# Altium PCB PCB1.PcbDoc
Units mil, origin at the board's own origin, x right, y up, seen from the top; angles counter-clockwise.
Board outline 1633.86 x 1468.5 mil, 2 copper layers (Top Layer, Bottom Layer); 17 components, 12 nets, 42 pads, 2 vias.
Unrouted connection lines stored in the file: 1.
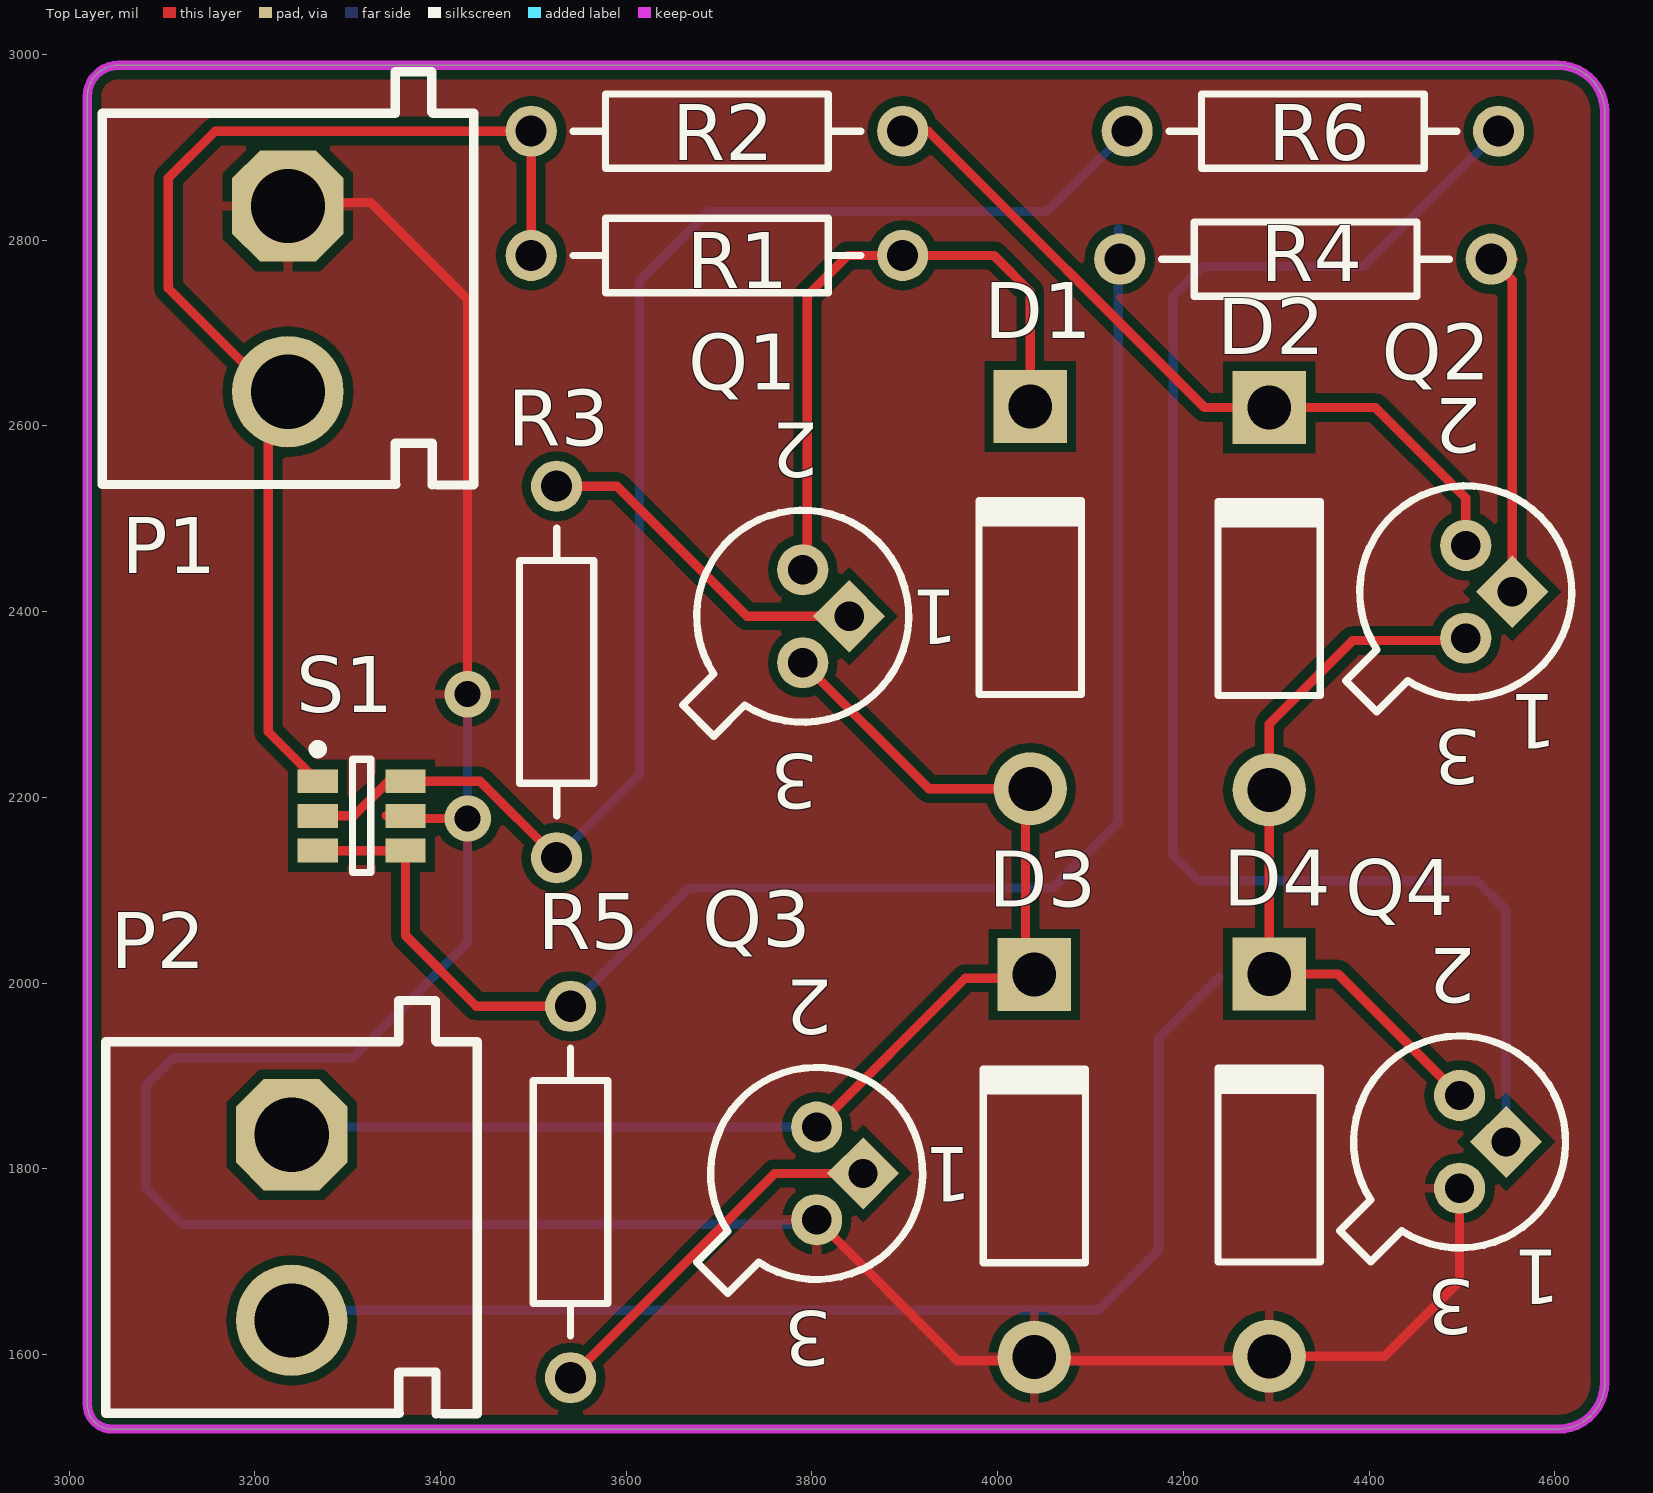
[diagram p0: Top Layer view]
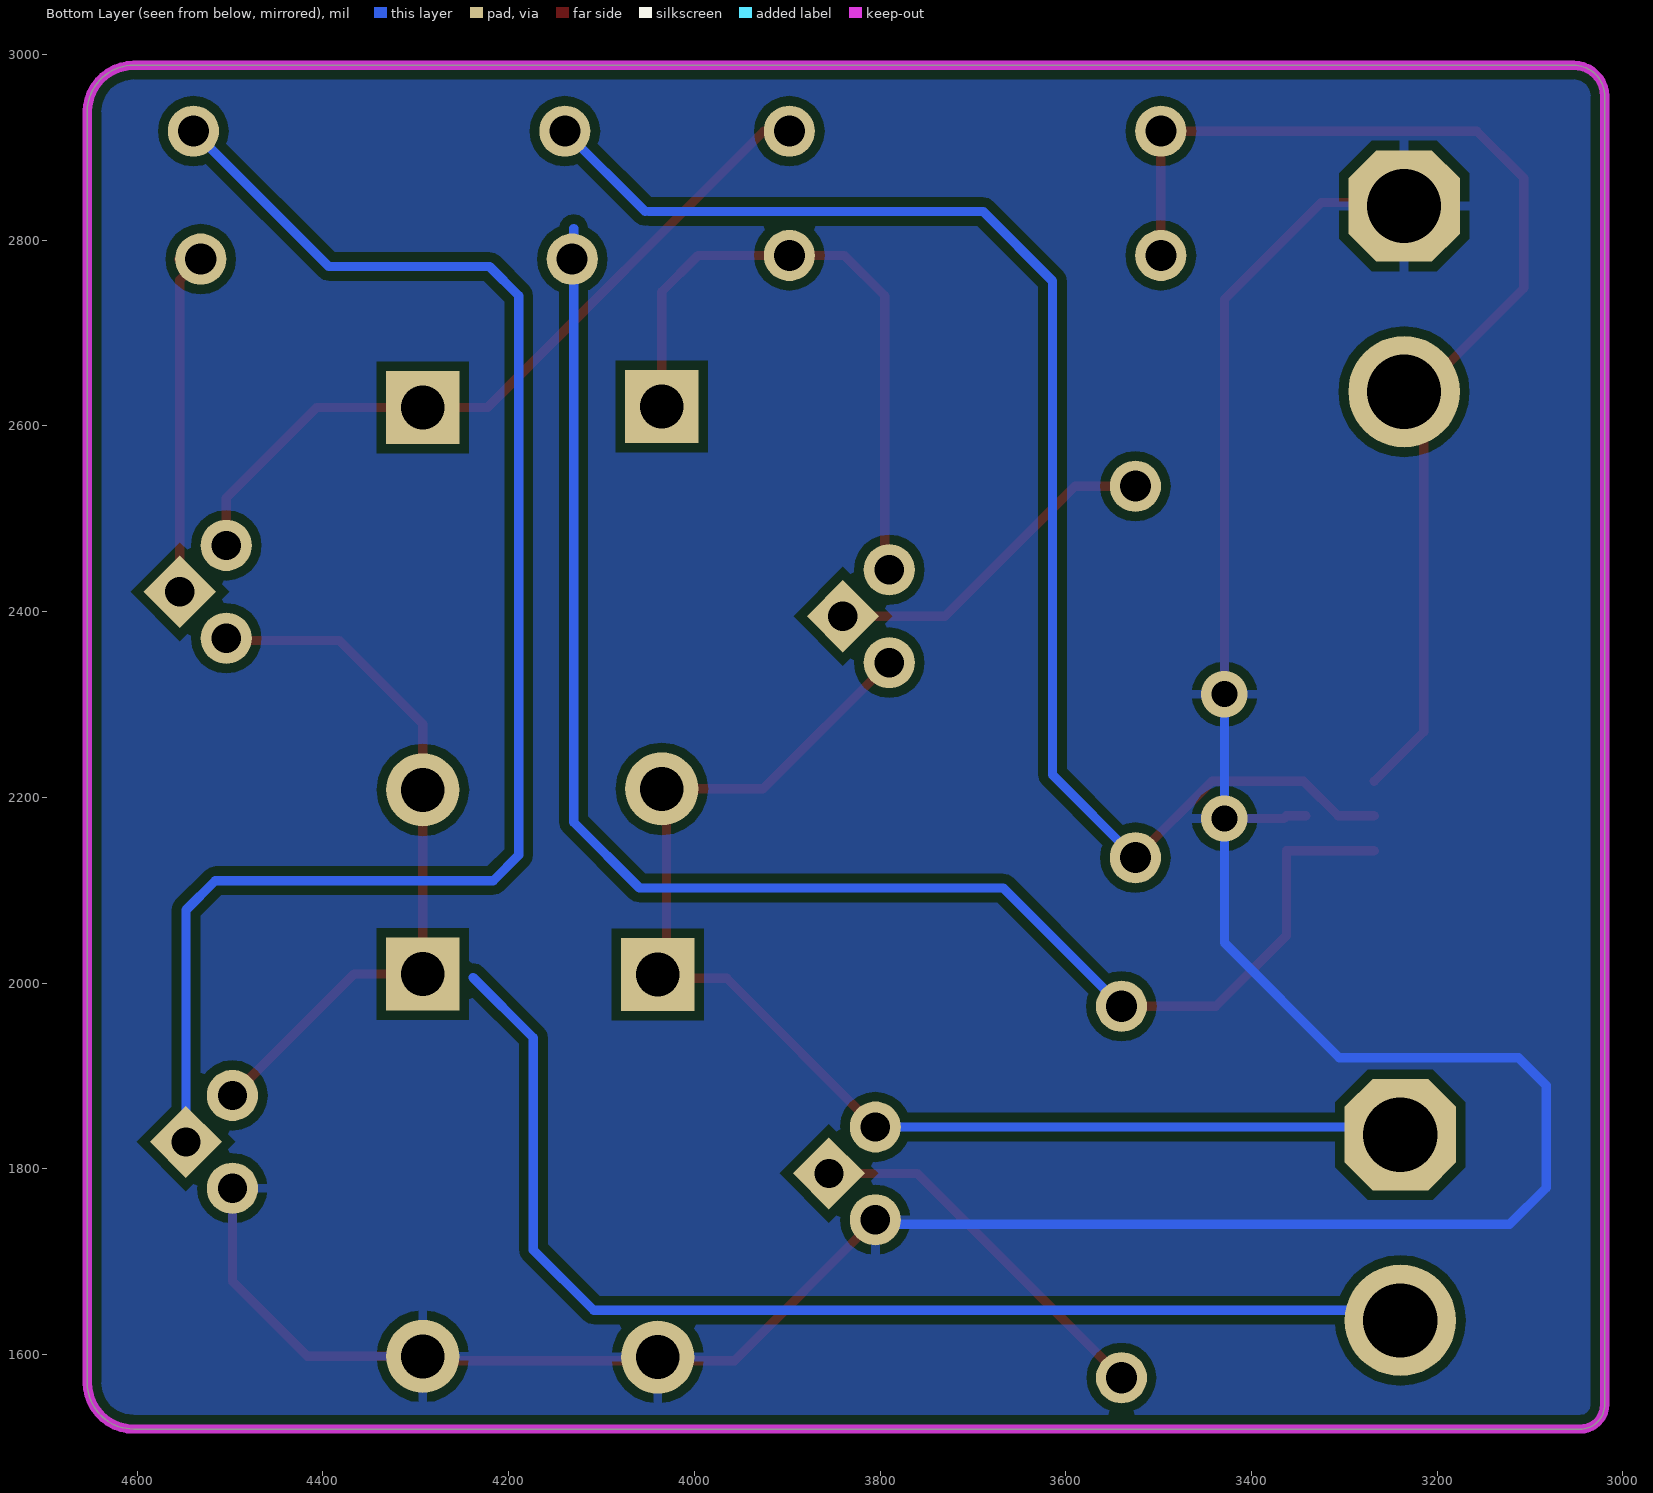
[diagram p1: Bottom Layer view, seen from below]
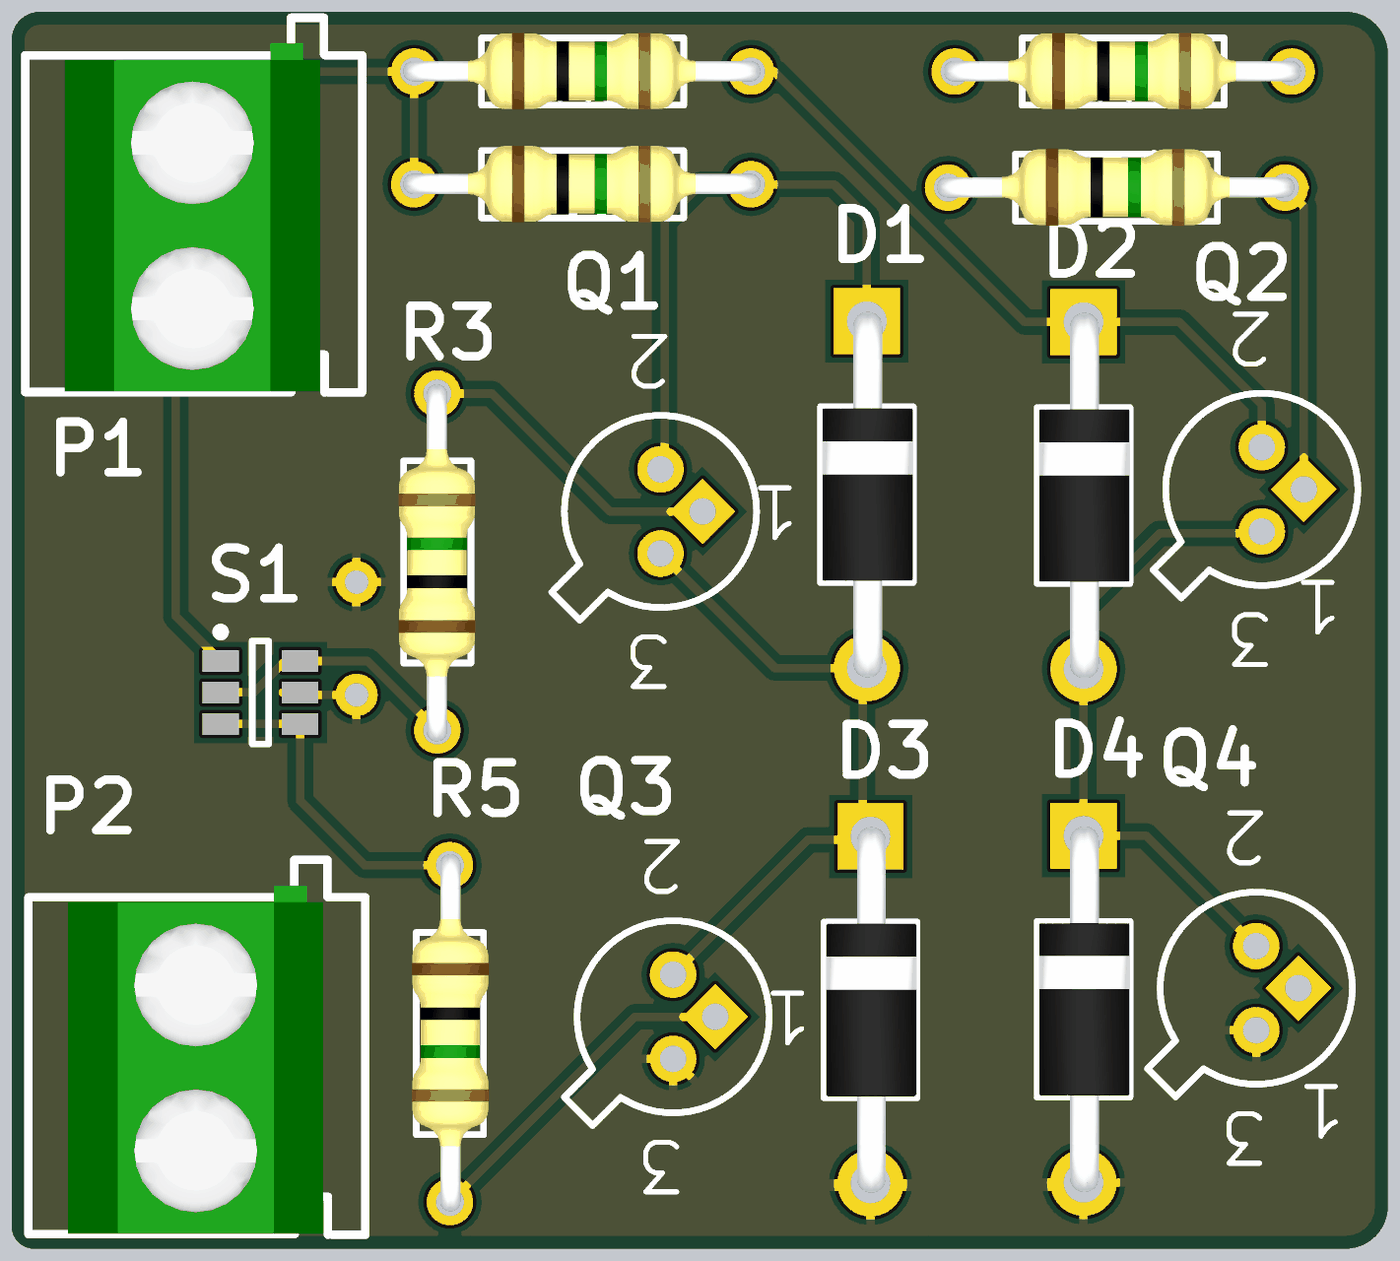
[diagram p2: 3D render of the assembled board from above, using the file's embedded part models]

## Layer stack, top to bottom
Top Layer: signal copper 1.4
Dielectric: dielectric 12.6, FR-4, Dk 4.8
Bottom Layer: signal copper 1.4

## Board outline
3019.68,1546.06 ccw(c3046.06,1546.06) 3046.06,1519.68 4603.54,1519.68 ccw(c4603.54,1569.68) 4653.54,1569.68 4653.54,2938.19 ccw(c4603.54,2938.19) 4603.54,2988.19 3053.01,2988.19 ccw(c3053.01,2954.87) 3019.68,2954.87

## Design rules (kind name [scope] priority, off if disabled: settings)
Clearance [All] p1: gap=10
PolygonConnect [All] p1: connectstyle=Relief reliefconductorwidth=10 reliefentries=4 polygonreliefangle="90 Angle" airgapwidth=10
RoutingVias [All] p1: holewidth=28 width=50 viastyle="Through Hole" minholewidth=28 minwidth=50 maxholewidth=28 maxwidth=50
SolderMaskExpansion [All] p1: expansion=4
Width [All] p1: maxlimit=10 minlimit=10 preferedwidth=10
28 further rules are at their usual default settings.

## Classes and differential pairs
component class Sheet1: D1 D2 D3 D4 P2 Q1 Q2 Q4 R1 R2 R3 R4 R5 R6 S1

## Components (designator, comment, footprint, x,y, rotation, side; value= is the part's Value field where it differs from the comment)
D1 "1N4007" DO-41 4035,2415 r90 top
D2 "1N4007" DO-41 4292.32,2413.94 r90 top
D3 "1N4007" DO-41 4039.37,1803.15 r90 top
D4 "1N4007" DO-41 4292.32,1803.94 r90 top
P1 "Terminal 2pin" "Terminal 2pin" 3236.22,2736.22 r270 top
P2 "Terminal 2pin" "Terminal 2pin" 3240.16,1736.22 r270 top
Q1 "2N2222A" TO-18 3790,2395 r180 top
Q2 "2N2222A" TO-18 4503.94,2421.26 r180 top
Q3 "2N2222A" TO-18 3805,1795 r180 top
Q4 "2N2222A" TO-18 4497.32,1828.94 r180 top
R1 "1K" Axial-0.4-0.25W 3712.6,2783.46 r180 top
R2 "1K" Axial-0.4-0.25W 3712.6,2917.32 r180 top
R3 "1K" Axial-0.4-0.25W 3525,2350 r270 top
R4 "1K" Axial-0.4-0.25W 4346.46,2779.53 r180 top
R5 "1K" Axial-0.4-0.25W 3540,1760 r90 top
R6 "1K" Axial-0.4-0.25W 4354.33,2917.32 r180 top
S1 "SW DPDT" SOT23-6_N 3315,2180 r0 top

## Footprints (in the part's own frame and the unit in brackets; to place one, negate y for a bottom-side part, rotate by r counter-clockwise, add the part's x,y. Pads: shape width x height; smd on the part's side, far side on the other; paste and mask are expansions set on the pad)
Axial-0.4-0.25W [mm]
  round 1.4 hole 0.85: 1(-4.699,0) 2(5.461,0)
  silkscreen extent -3.56,-1.02 4.32,1.02, body extent -4.98,-1.17 5.79,1.14, height 3.43
DO-41 [mm] "Diode, Axial; Body 5.2 x 2.7 mm (LxDia. max), Lead Dia. 0.86 mm (max)"
  round 2 hole 1.2: 1(-5.23,0)
  rect 2x2 hole 1.2: 2(5.23,0)
  silkscreen extent -2.65,-1.4 2.75,1.4, body extent -5.51,-1.4 5.51,1.34, height 3.23
SOT23-6_N [mm] "SOT23, 6-Leads, Body 2.9x1.6mm, Pitch 0.95mm, Lead Span 2.7mm, IPC Medium Density"
  rect 1.1x0.65 smd: 1(-1.2,0.95) 2(-1.2,0) 3(-1.2,-0.95) 4(1.2,-0.95) 5(1.2,0) 6(1.2,0.95)
  silkscreen extent -1.32,-1.55 0.25,1.95, body extent -0.9,-1.55 0.9,1.55, height 1.45
"Terminal 2pin" [mil]
  oct 120x120 hole 80: 1(-100.5,-0.5)
  round 120 hole 80: 2(99.5,-0.5)
  silkscreen extent -245,-201 200,200, body extent -215,-154 199,150, height 413
TO-18 [mm] "Can; 3 Leads; Pin Circle Dia. 2.54 mm; Lead Dia. 0.49 mm (max)"
  rect 1.4x1.4 hole 0.8 rot 45: 1(-1.27,0)
  round 1.4 hole 0.8: 2(0,-1.27) 3(0,1.27)
  silkscreen extent -2.9,-2.9 3.28,3.28

## Part data
D1 D2 D3 D4: "1 Amp Diode"
Q1 Q2 Q3 Q4: "High Speed Switches"
R1 R2 R3 R4 R5 R6: library part RES
S1: "Switch"

## Via types
v1: diameter 50, hole 28, Top Layer to Bottom Layer, 2 vias

## Nets (pads, with @x,y where several pads share a name; then routed paths per layer and width w, separated by ;. In a path a pad name is that pad's centre, name@x,y a point inside that pad or via, vN(x,y) a via of type N, cw(c..) or ccw(c..) an arc to the next point about the centre after c; other vN are vias at no path point)
GND: D3.1 D4.1 P1.1 Q3.3 Q4.3 S1.5 | length 3170
  Top Layer w10: P1.1@3235.72,2840.5 3324.85,2840.5 3429.13,2736.22 v1(3429.13,2311.02) ; S1.5@3341.42,2180 S1.5 3365.08,2177.17 v1(3429.13,2177.17) ; Q3.3 3956.69,1593.31 4287.6,1593.31 D4.1 4416.42,1598.03 4497.32,1678.94 Q4.3
  Bottom Layer w10: v1(3429.13,2311.02) v1(3429.13,2177.17) 3429.13,2043.31 3305.42,1919.59 3112.51,1919.59 3082.68,1889.76 3082.68,1779.53 3122.05,1740.16 3800.16,1740.16 Q3.3
NetD1_1: D1.1 D3.2 P2.1 Q1.3 Q3.2 | length 1380.7
  Top Layer w10: Q1.3 3925.91,2209.09 D1.1 4030,2204.09 4030,2014.49 4039.37,2005.12 3965.12,2005.12 Q3.2
  Bottom Layer w10: P2.1 3247.94,1845 Q3.2
NetD1_2: D1.2 Q1.2 R1.1 | length 694.8
  Top Layer w10: Q1.2 3795,2450 3795,2740 3838.46,2783.46 R1.1 3996.06,2783.46 4035,2744.53 D1.2
NetD2_1: D2.1 D4.2 P2.2 Q2.3 Q4.2 | length 2087.1
  Top Layer w10: D2.1@4312.32,2218.03 D2.1@4292.32,2198.03 ; Q4.2 4366.42,2009.84 D4.2 D2.1@4292.32,2198.03 ; Q2.3 4501.61,2368.94 4382.32,2368.94 4292.32,2278.94 D2.1 D2.1@4292.32,2198.03
  Bottom Layer w10: P2.2@3239.66,1647.68 4108.31,1647.68 4173.23,1712.6 4173.23,1940.94 4238.19,2005.91
NetD2_2: D2.2 Q2.2 R2.1 | length 821
  Top Layer w10: R2.1 3925.16,2917.32 4222.64,2619.84 D2.2 4406.42,2619.84 4503.94,2522.32 Q2.2
NetQ1_1: Q1.1 R3.1 | length 373
  Top Layer w10: R3.1 3590,2535 3730,2395 Q1.1
NetQ2_1: Q2.1 R4.1 | length 391.2
  Top Layer w10: Q2.1 4553.94,2757.05 R4.1 R4.1@4555.12,2779.53
NetQ3_1: Q3.1 R5.1 | length 406.1
  Top Layer w10: R5.1 3760,1795 Q3.1
NetQ4_1: Q4.1 R6.1 | length 1658.7
  Bottom Layer w10: 4259.8,2771.65 4393.66,2771.65 R6.1 ; 4259.84,2771.65 4220.43,2771.65 4188.98,2740.2 4188.98,2137.8 4216.54,2110.24 4515.75,2110.24 4547.32,2078.66 Q4.1
NetR3_2: R3.2 R6.2 S1.2 S1.6 | length 1575
  Top Layer w10: S1.2 3306.58,2180 3343.98,2217.4 S1.6 3442.6,2217.4 R3.2 R3.2@3502.8,2135
  Bottom Layer w10: R3.2 3614.17,2224.17 3614.17,2755.91 3688.98,2830.71 4048.78,2830.71 ; 4052.72,2830.71 R6.2
NetR4_2: R4.2 R5.2 S1.3 S1.4 | length 1710
  Top Layer w10: S1.3 S1.4 3362.24,2051.14 3438.39,1975 R5.2
  Bottom Layer w10: R5.2 3667.36,2102.36 4059.06,2102.36 4129.92,2173.23 4129.92,2812.56 ; R4.2 R4.2@4133.86,2777.13
VCC: P1.2 R1.2 R2.2 S1.1 | length 1261.4
  Top Layer w10: S1.1 3214.5,2270.66 3214.5,2640.5 3106.97,2748.03 3106.97,2866.81 3157.48,2917.32 R2.2 R1.2

## Polygon pours and split planes (outlines as drawn)
GND on Top Layer "Top Layer-No Net" (solid, remove dead copper, pour order 5): 2929.13,3047.24 4681.1,3047.24 4681.1,1523.62 4669.29,1511.81 4665.35,1507.87 2976.38,1507.87
GND on Bottom Layer "Top Layer-No Net" (solid, remove dead copper, pour order 7): 2925.2,3090.55 4637.8,3090.55 4783.46,2944.88 4677.17,2838.58 4677.17,1444.88 3035.43,1444.88 2976.38,1503.94

## Keep-outs
Keep-Out Layer:
  lines w10: 3019.68,1546.06 ccw(c3046.06,1546.06) 3046.06,1519.69 4603.54,1519.68 ccw(c4603.54,1569.68) 4653.54,1569.68 4653.54,2938.19 ccw(c4603.54,2938.19) 4603.54,2988.19 3053.01,2988.19 ccw(c3053.01,2954.87) 3019.68,2954.87 3019.68,2942.13 3019.68,1573.62 3019.68,1546.06

## Text inside footprints (layer, text, board x,y; h text height)
Q1: Top Overlay "1" at 3957.8,2423.27 h59.05 r180; Top Overlay "2" at 3807.44,2603.31 h59.05 r180; Top Overlay "3" at 3806.5,2246.5 h59.05 r180
Q2: Top Overlay "1" at 4602.36,2311.02 h59.05 r180; Top Overlay "2" at 4521.38,2629.57 h59.05 r180; Top Overlay "3" at 4520.43,2272.76 h59.05 r180
Q3: Top Overlay "1" at 3972.8,1823.27 h59.05 r180; Top Overlay "2" at 3822.44,2003.31 h59.05 r180; Top Overlay "3" at 3821.5,1646.5 h59.05 r180
Q4: Top Overlay "1" at 4606.3,1712.6 h59.05 r180; Top Overlay "2" at 4514.76,2037.24 h59.05 r180; Top Overlay "3" at 4513.82,1680.43 h59.05 r180